# Altium PCB PCB1_Demo.PcbDoc
Units mil, origin at the board's own origin, x right, y up, seen from the top; angles counter-clockwise.
Board outline 4429.1 x 4452.01 mil, 2 copper layers (Top Layer, Bottom Layer); 90 components, 122 nets, 389 pads, 32 vias.
Unrouted connection lines stored in the file: 2.
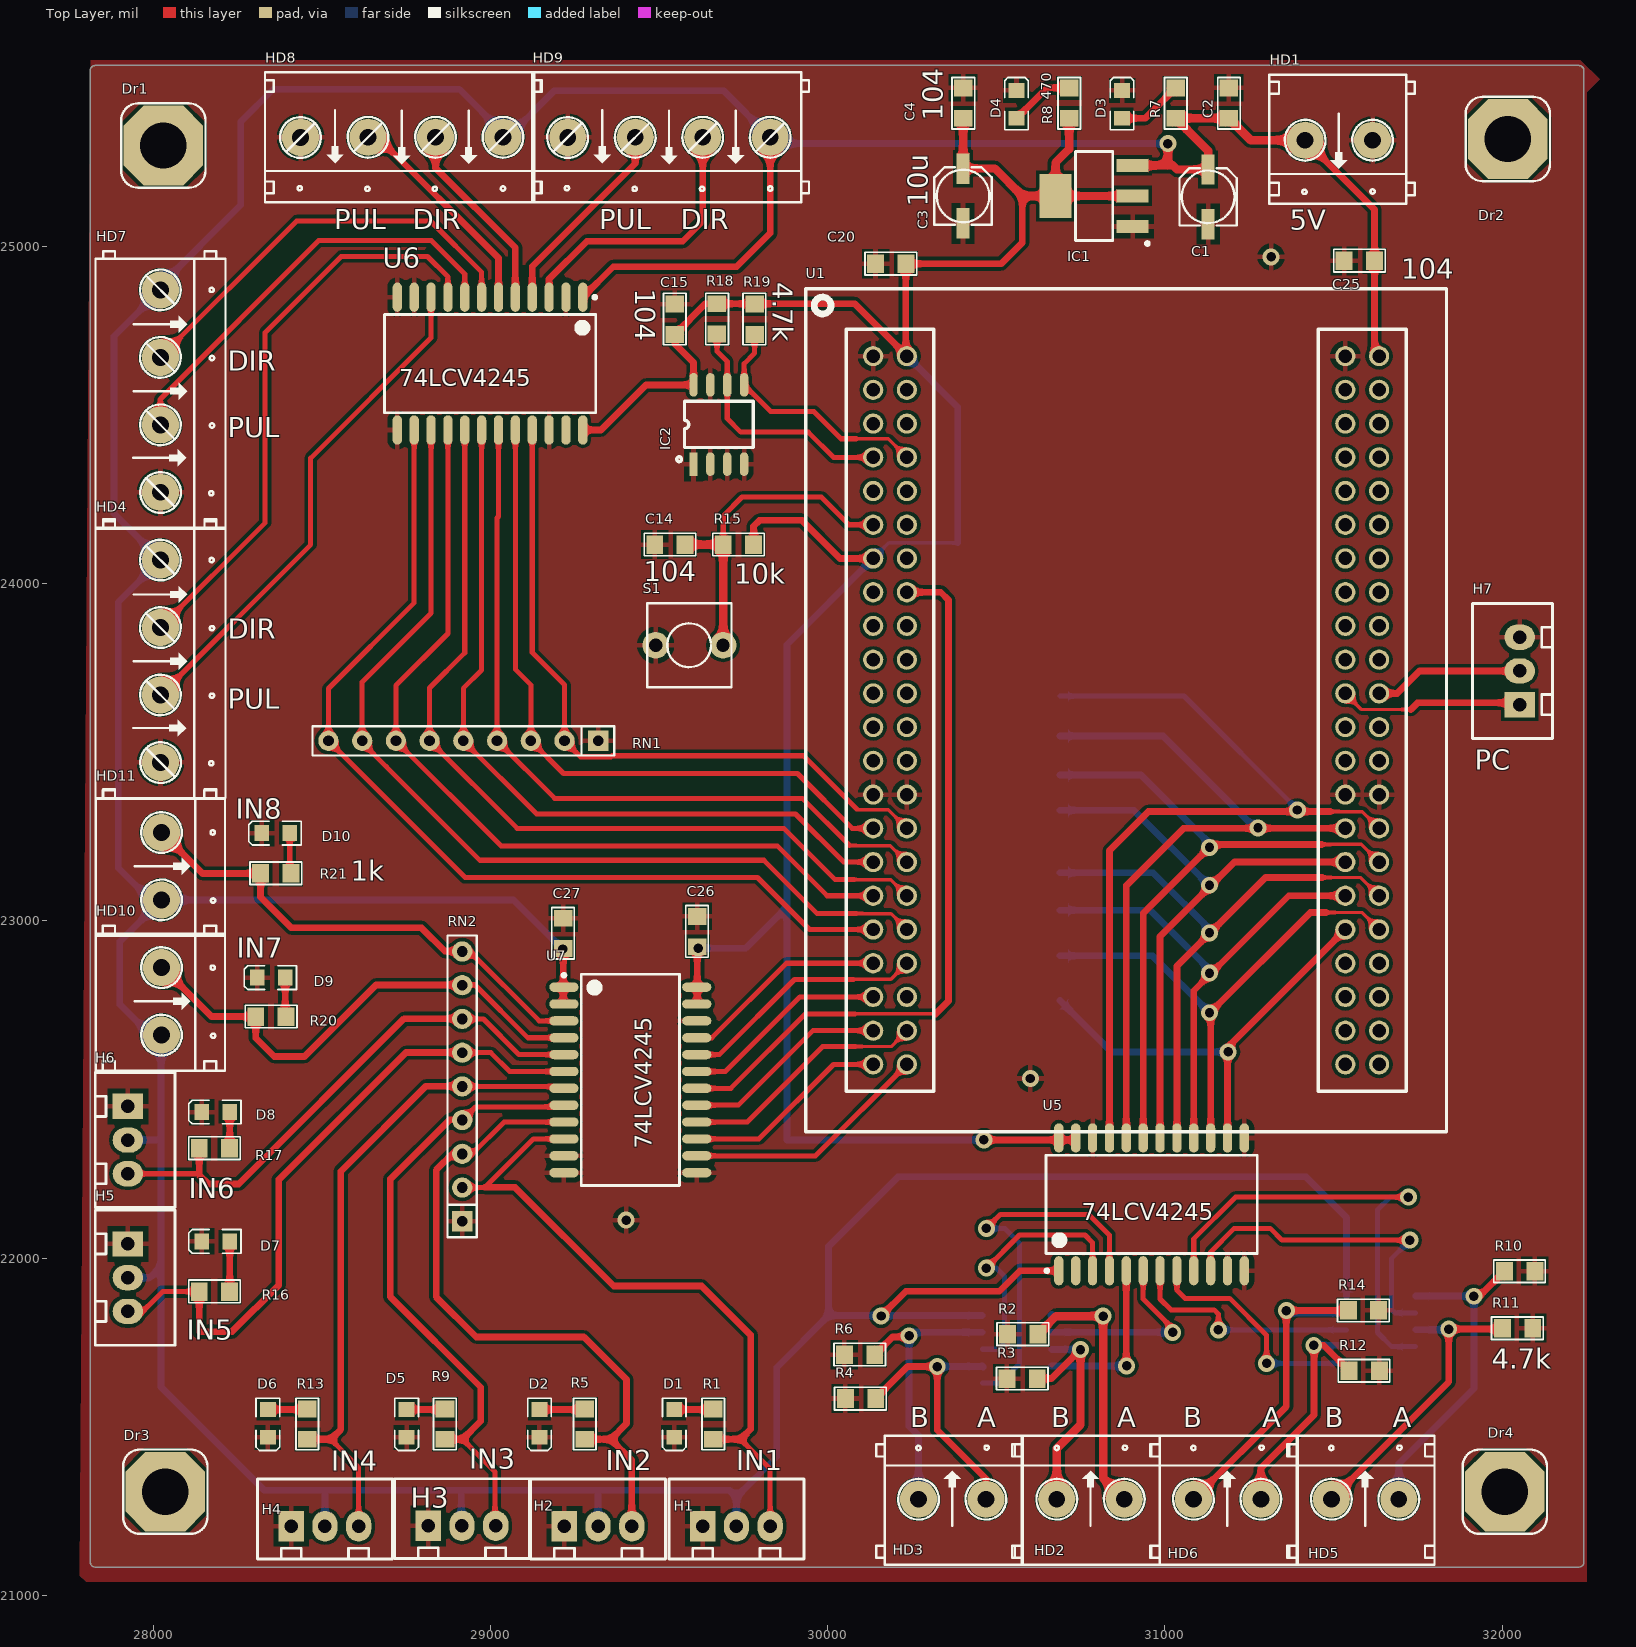
[diagram p0: Top Layer view]
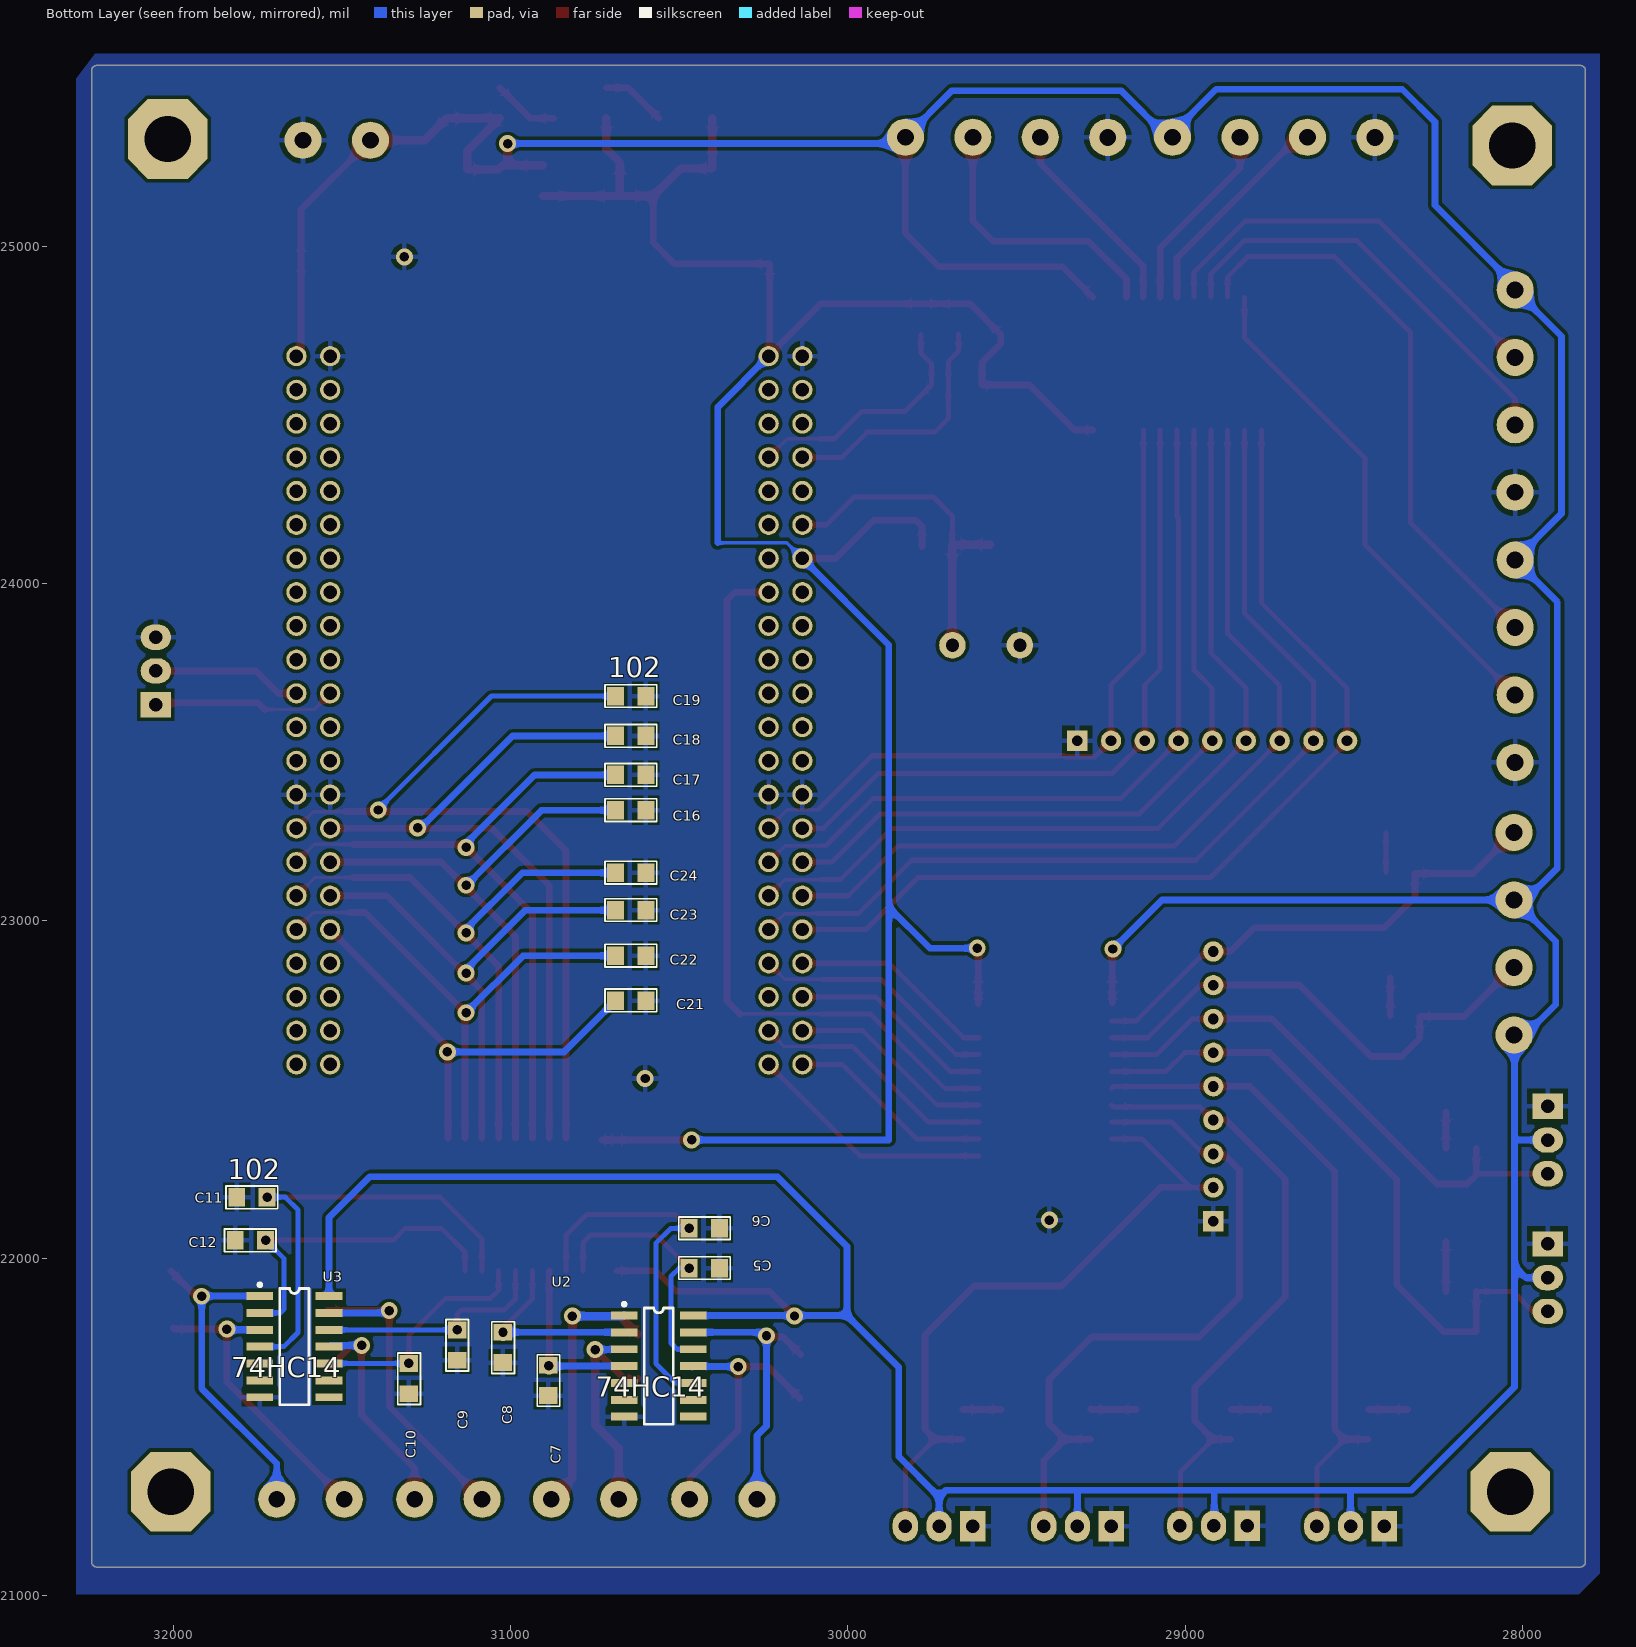
[diagram p1: Bottom Layer view, seen from below]
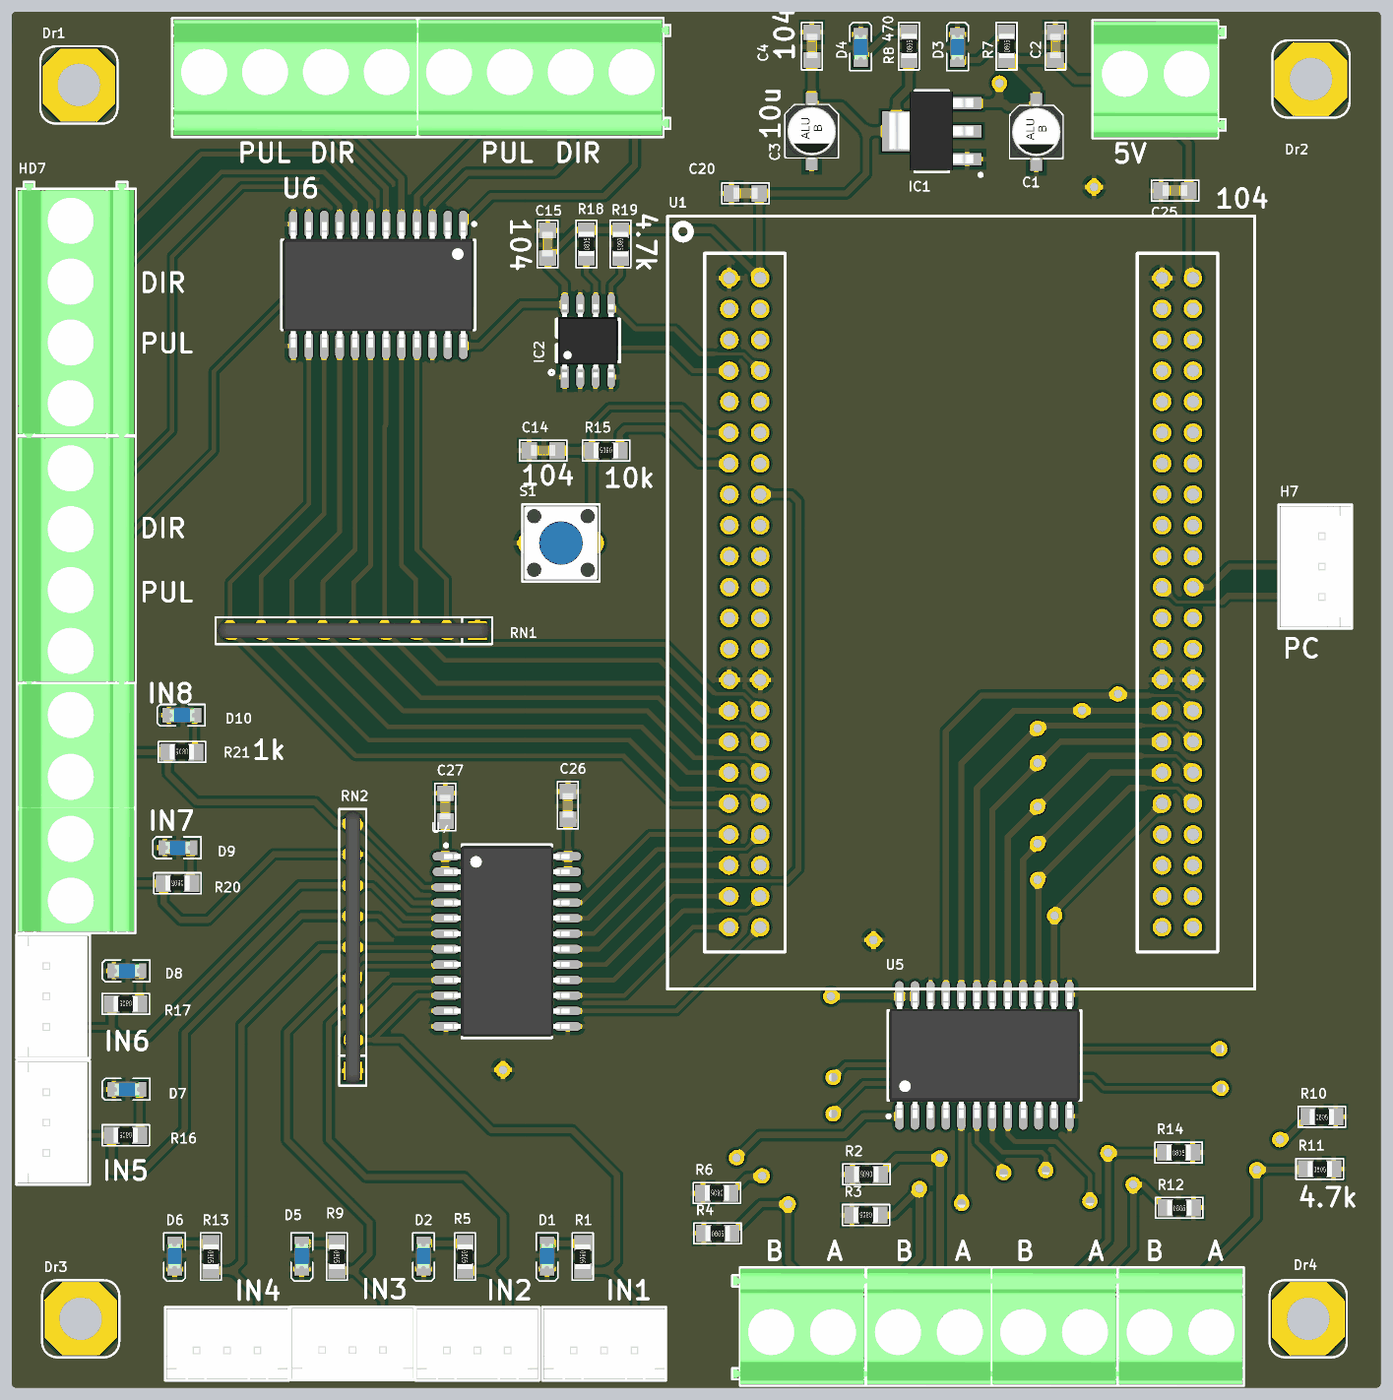
[diagram p2: 3D render of the assembled board from above, using the file's embedded part models]
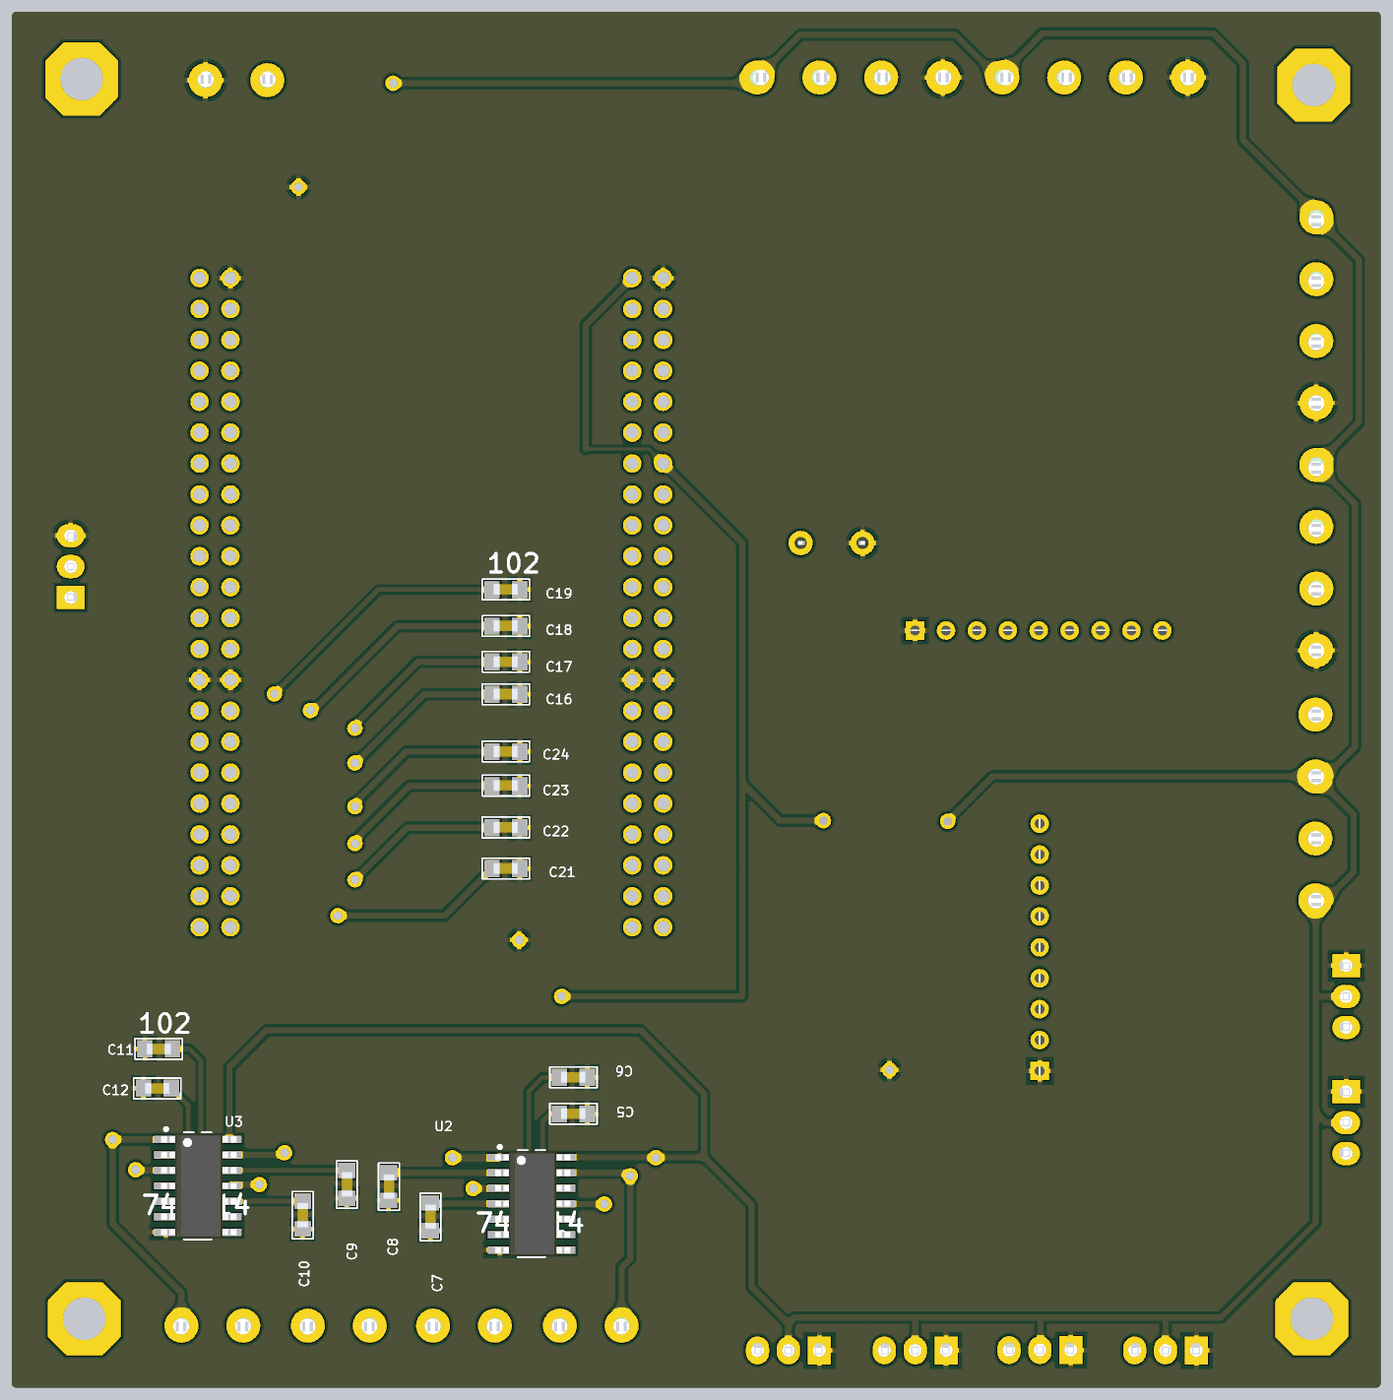
[diagram p3: 3D render of the assembled board from below, using the file's embedded part models]

## Layer stack, top to bottom
Top Solder: solder mask 0.4, Solder Resist, Dk 3.5
Top Layer: signal copper 1.4
Dielectric 1: dielectric 12.6, FR-4, Dk 4.8
Bottom Layer: signal copper 1.4
Bottom Solder: solder mask 0.4, Solder Resist, Dk 3.5

## Board outline
27813.19,21099.42 ccw(c27828.21,21099.42) 27828.21,21084.41 32227.28,21084.41 ccw(c32227.28,21099.42) 32242.29,21099.42 32242.29,25521.4 ccw(c32227.28,25521.4) 32227.28,25536.41 27828.21,25536.41 ccw(c27828.21,25521.4) 27813.19,25521.4

## Design rules (kind name [scope] priority, off if disabled: settings)
Clearance Clearance_1 [All] p1: gap=10
Clearance [All] p2: gap=20
PolygonConnect [All] p1: connectstyle=Relief reliefconductorwidth=15 reliefentries=4 polygonreliefangle="90 Angle" airgapwidth=15
RoutingVias [All] p1: holewidth=28 width=50 viastyle="Through Hole" minholewidth=28 minwidth=50 maxholewidth=28 maxwidth=50
SolderMaskExpansion [All] p1: expansion=4
Width [All] p1: maxlimit=100 minlimit=10 preferedwidth=10
30 further rules are at their usual default settings.

## Components (designator, comment, footprint, x,y, rotation, side; value= is the part's Value field where it differs from the comment)
C1 "10uF/16V" CAP_ALU_B 31127.96,25228.01 r270 top
C2 "104" CAP-SM-0805 31189.22,25380.05 r90 top
C3 "10uF/16V" CAP_ALU_B 30401.23,25230.54 r270 top
C4 "104" CAP-SM-0805 30401.64,25380.05 r90 top
C5 "102" CAP-SM-0805 30380.59,21970.63 r0 bottom
C6 "102" CAP-SM-0805 30380.59,22088.54 r0 bottom
C7 "102" CAP-SM-0805 30888.09,21592.86 r90 bottom
C8 "102" CAP-SM-0805 31022.66,21690.44 r90 bottom
C9 "102" CAP-SM-0805 31158.54,21697.66 r90 bottom
C10 "102" CAP-SM-0805 31301.31,21598.26 r90 bottom
C11 "102" CAP-SM-0805 31811.73,22181.15 r180 bottom
C12 "102" CAP-SM-0805 31816.25,22053.59 r180 bottom
C14 "104" CAP-SM-0805 29577.18,24115.94 r180 top
C15 "104" CAP-SM-0805 29547,24829.12 r270 top
C16 "102" CAP-SM-0805 30598.97,23328.05 r0 bottom
C17 "102" CAP-SM-0805 30598.97,23432.89 r0 bottom
C18 "102" CAP-SM-0805 30598.97,23548.5 r0 bottom
C19 "102" CAP-SM-0805 30598.97,23666.7 r0 bottom
C20 "104" CAP-SM-0805 30231.81,24948.38 r180 top
C21 "102" CAP-SM-0805 30598.97,22764.06 r0 bottom
C22 "102" CAP-SM-0805 30598.97,22896.72 r0 bottom
C23 "102" CAP-SM-0805 30598.97,23032.13 r0 bottom
C24 "102" CAP-SM-0805 30598.97,23142.68 r0 bottom
C25 "104" CAP-SM-0805 31621.29,24957.11 r180 top
C26 "104" CAP-SM-0805 29613.1,23013.73 r270 top
C27 "104" CAP-SM-0805 29216,23008.11 r270 top
D1 "LED" LED_0805_Blue 29545.06,21510.17 r270 top
D2 "LED" LED_0805_Blue 29145.42,21510.17 r270 top
D3 "LED" LED_0805_Blue 30872.83,25421.05 r90 top
D4 "LED" LED_0805_Blue 30559.72,25421.05 r90 top
D5 "LED" LED_0805_Blue 28751.63,21510.17 r270 top
D6 "LED" LED_0805_Blue 28340.25,21510.17 r270 top
D7 "LED" LED_0805_Blue 28185.58,22050.11 r180 top
D8 "LED" LED_0805_Blue 28185.58,22433.52 r180 top
D9 "LED" LED_0805_Blue 28350.29,22831.83 r180 top
D10 "LED" LED_0805_Blue 28363.75,23260.4 r180 top
Dr1 "Drill" "Drill 3mm" 28030.44,25299.19 r0 top
Dr2 "Drill" "Drill 3mm" 32016.5,25318.47 r0 top
Dr3 "Drill" "Drill 3mm" 28036.06,21307.92 r0 top
Dr4 "Drill" "Drill 3mm" 32007.63,21307.92 r0 top
H1 "IN 1" "Header White 3" 29629.54,21205.44 r0 top
H2 "IN 2" "Header White 3" 29219.24,21205.44 r0 top
H3 "IN 3" "Header White 3" 28815.74,21206.61 r0 top
H4 "IN 4" "Header White 3" 28409.51,21205.44 r0 top
H5 "IN 5" "Header White 3" 27925.1,22042.37 r270 top
H6 "IN 6" "Header White 3" 27925.1,22450.51 r270 top
H7 "PC" "Header White 3" 32051.78,23641.24 r90 top
HD1 "5V IN" "Domino 2" 31615.52,25314.85 r180 top
HD2 "ENC 1" "Domino 2" 30679.25,21285.58 r0 top
HD3 "ENC 2" "Domino 2" 30269.11,21285.58 r0 top
HD4 "PWM 1" "Domino 4" 28021.5,24070.07 r270 top
HD5 "ENC 3" "Domino 2" 31493.31,21285.58 r0 top
HD6 "ENC 4" "Domino 2" 31084.31,21285.58 r0 top
HD7 "PWM 2" "Domino 4" 28021.5,24871.01 r270 top
HD8 "PWM 3" "Domino 4" 29037.36,25323.57 r180 top
HD9 "PWM 4" "Domino 4" 29829.52,25323.57 r180 top
HD10 "IN 7" "Domino 2" 28024.67,22861.72 r270 top
HD11 "IN 8" "Domino 2" 28024.67,23262.45 r270 top
IC1 "LM1117-3V3" SOT223-4N 30789.92,25149.51 r180 top
IC2 "24Cxx" SOIC8 29602.22,24354.41 r90 top
R1 "1k" RES-SM-0805 29661.09,21553.17 r270 top
R2 "4.7k" RES-SM-0805 30623.15,21774.42 r180 top
R3 "4.7k" RES-SM-0805 30621.44,21643.19 r180 top
R4 "4.7k" RES-SM-0805 30052.36,21584.14 r0 top
R5 "1k" RES-SM-0805 29280.2,21553.17 r270 top
R6 "4.7k" RES-SM-0805 30139.54,21713.88 r180 top
R7 "470" RES-SM-0805 31031.36,25380.05 r90 top
R8 "470" RES-SM-0805 30715.82,25380.05 r90 top
R9 "10k" RES-SM-0805 28865.31,21553.17 r270 top
R10 "4.7k" RES-SM-0805 32006.89,21961.92 r0 top
R11 "4.7k" RES-SM-0805 32000.28,21793.03 r0 top
R12 "4.7k" RES-SM-0805 31545.78,21666.87 r0 top
R13 "1k" RES-SM-0805 28457.45,21553.17 r270 top
R14 "4.7k" RES-SM-0805 31543.61,21845.87 r0 top
R15 "10k" RES-SM-0805 29780.36,24115.94 r180 top
R16 "1k" RES-SM-0805 28226.58,21901.27 r180 top
R17 "1k" RES-SM-0805 28226.58,22325.88 r180 top
R18 "4.7k" RES-SM-0805 29671.75,24740.12 r90 top
R19 "4.7k" RES-SM-0805 29783.16,24829.12 r270 top
R20 "1k" RES-SM-0805 28394.32,22716.55 r180 top
R21 "1k" RES-SM-0805 28408.5,23141.06 r180 top
RN1 "10K" RN8 29319.74,23534.41 r180 top
RN2 "10K" RN8 28916.55,22109.52 r90 top
S1 "Reset" SW2 29489.93,23817.53 r0 top
U1 "STM_CPLD_Board" STM_CPLD_Board 30134.84,24674.72 r0 top
U2 "74HC14" SO14-150mil 30560.86,21680.25 r270 bottom
U3 "74HC14" SO14-150mil 31640.8,21737.86 r270 bottom
U5 "74LCV4245" "SOIC24 - wide" 30960.38,22159.76 r90 top
U6 "74LCV4245" "SOIC24 - wide" 28998.99,24652.56 r270 top
U7 "74LCV4245" "SOIC24 - wide" 29414.96,22528.76 r0 top

## Footprints (in the part's own frame and the unit in brackets; to place one, negate y for a bottom-side part, rotate by r counter-clockwise, add the part's x,y. Pads: shape width x height; smd on the part's side, far side on the other; paste and mask are expansions set on the pad)
CAP-SM-0805 [mil]
  rect 50x55 smd: 1(0,0) 2(90,0)
  silkscreen extent -32,-34 121,33, body extent 6,-18 84,17, height 47
CAP_ALU_B [mil] "10uF -> 22uF"
  rect 90x38 smd: 1(0,0) 2(162,0)
  silkscreen extent -4,-85 166,85, body extent -10,-85 172,85, height 213
"Domino 2" [mil] "Domino 2, 2 pin, hight 300mil, Pin to Pin 200, Colour Green"
  round 110 hole 50: 1(0,0) 2(200,0)
  silkscreen extent -125,-194 306,189, body extent -121,-190 301,184, height 591
"Domino 4" [mil] "Domino 4, 4 pin, height 300mil, Pin to Pin 200, Colour Green"
  round 110 hole 50: 1(0,0) 2(200,0) 3(400,0.06) 4(600,0.39)
  silkscreen extent -115,-193 706,193, body extent -110,-187 700,187, height 591
"Drill 3mm" [mm]
  oct 6x6 hole 3.5: 1(0,0)
  silkscreen extent -3.17,-3.17 3.17,3.17
"Header White 3" [mil] "JST Connector"
  rect 75x90 hole 40: 1(0,0)
  oval 75x90 hole 40: 2(100,0) 3(200,0)
  silkscreen extent -100,-97 300,140, body extent -95,-93 295,134, height 276
LED_0805_Blue [mm] "Chip LED, 2-Leads, Body 2.0x1.3mm, IPC Medium Density"
  rect 1.1x1.2 smd: 1(-1.05,0) 2(1.05,0)
  silkscreen extent -1.91,-0.89 2.03,0.89, body extent -1.01,-0.62 1.01,0.63, height 1.1
RES-SM-0805 [mil]
  rect 50x55 smd: 1(0,0) 2(90,0)
  silkscreen extent -32,-34 121,33, body extent 6,-25 84,24, height 10
RN8 [mil] "R SIP8, 9 Pin"
  rect 60x60 hole 32: 1(0,0)
  round 60 hole 32: 2(100,0) 3(200,0) 4(300,0) 5(400,0) 6(500,0) 7(600,0) 8(700,0) 9(800,0)
  silkscreen extent -48,-43 847,44, body extent -43,-25 843,24, height 219
SO14-150mil [mm] "Small Outline; 14 Leads; Body Width 3.9 mm; Pitch 1.27 mm"
  rect 0.6x2 smd: 1(-3.81,-2.6) 2(-2.54,-2.6) 3(-1.27,-2.6) 4(0,-2.6) 5(1.27,-2.6) 6(2.54,-2.6) 7(3.81,-2.6) 8(3.81,2.6) 9(2.54,2.6) 10(1.27,2.6) 11(0,2.6) 12(-1.27,2.6) 13(-2.54,2.6) 14(-3.81,2.6)
  silkscreen extent -4.78,-2.72 4.38,1.1, body extent -4.32,-3 4.32,3.2, height 1.7
SOIC8 [mil]
  rect 70x25 smd: 1(0,0)
  oval 70x25 smd: 2(0,-50) 3(0,-100) 4(0,-150) 5(235,-150) 6(235,-100) 7(235,-50) 8(235,0)
  silkscreen extent 8,-178 187,50, body extent -1,-171 235,21, height 69
"SOIC24 - wide" [mm] "SOIC, 24-Leads, Body 15.4x7.5mm, Pitch 1.27mm, IPC Low Density"
  oval 2.2x0.7 smd: 1(-5,6.985) 2(-5,5.715) 3(-5,4.445) 4(-5,3.175) 5(-5,1.905) 6(-5,0.635) 7(-5,-0.635) 8(-5,-1.905) 9(-5,-3.175) 10(-5,-4.445) 11(-5,-5.715) 12(-5,-6.985) 13(5,-6.985) 14(5,-5.715) 15(5,-4.445) 16(5,-3.175) 17(5,-1.905) 18(5,-0.635) 19(5,0.635) 20(5,1.905) 21(5,3.175) 22(5,4.445) 23(5,5.715) 24(5,6.985)
  silkscreen extent -5.12,-7.95 3.7,8.01, body extent -5.15,-7.8 5.15,7.8, height 2.65
SOT223-4N [mm] "SOT223, 4-Leads, Body 6.5x3.5mm, Pitch 2.3mm, Lead Span 7mm, IPC Medium Density"
  rect 2.4x1 smd: 1(-2.9,2.3) 2(-2.9,0) 3(-2.9,-2.3)
  rect 2.4x3.3 smd: 4(2.9,0)
  silkscreen extent -4.14,-3.35 1.4,3.71, body extent -3.39,-3.27 3.5,3.23, height 1.72
STM_CPLD_Board [mil] "Stm32f4 and Max2 520 on one board"
  round 60 hole 40: 1(0,0) 2(0,-100) 3(0,-200) 4(0,-300) 5(0,-400) 6(0,-500) 7(0,-600) 8(0,-700) 9(0,-800) 10(0,-900) 11(0,-1000) 12(0,-1100) 13(0,-1200) 14(0,-1300) 15(0,-1400) 16(0,-1500) 17(0,-1600) 18(0,-1700) 19(0,-1800) 20(0,-1900) 21(0,-2000) 22(0,-2100) 23(100,-2100) 24(100,-2000) 25(100,-1900) 26(100,-1800) 27(100,-1700) 28(100,-1600) 29(100,-1500) 30(100,-1400) 31(100,-1300) 32(100,-1200) 33(100,-1100) 34(100,-1000) 35(100,-900) 36(100,-800) 37(100,-700) 38(100,-600) 39(100,-500) 40(100,-400) 41(100,-300) 42(100,-200) 43(100,-100) 44(100,0) 45(1400,0) 46(1400,-100) 47(1400,-200) 48(1400,-300) 49(1400,-400) 50(1400,-500) 51(1400,-600) 52(1400,-700) 53(1400,-800) 54(1400,-900) 55(1400,-1000) 56(1400,-1100) 57(1400,-1200) 58(1400,-1300) 59(1400,-1400) 60(1400,-1500) 61(1400,-1600) 62(1400,-1700) 63(1400,-1800) 64(1400,-1900) 65(1400,-2000) 66(1400,-2100) 67(1500,-2100) 68(1500,-2000) 69(1500,-1900) 70(1500,-1800) 71(1500,-1700) 72(1500,-1600) 73(1500,-1500) 74(1500,-1400) 75(1500,-1300) 76(1500,-1200) 77(1500,-1100) 78(1500,-1000) 79(1500,-900) 80(1500,-800) 81(1500,-700) 82(1500,-600) 83(1500,-500) 84(1500,-400) 85(1500,-300) 86(1500,-200) 87(1500,-100) 88(1500,0)
  silkscreen extent -200,-2300 1700,200
SW2 [mm] "SW button 2pin, 250x 250 mil"
  round 2 hole 1: 1(0,0) 2(5.08,0)
  silkscreen extent -0.64,-3.17 5.71,3.17, body extent -0.51,-3.05 5.59,3.05, height 4.2

## Part data
C1 C3: library part CP2, "C 47uF/50V , 220uF/16V"
C2 C4 C5 C6 C7 C8 C9 C10 C11 C12 C14 C15 C16 C17 C18 C19 C20 C21 C22 C23 C24 C25 C26 C27: library part CAP_SM_0805, "Ceramic Capacitor SMD"
D1 D2 D3 D4 D5 D6 D7 D8 D9 D10: library part LED_SMD, "LED SMD"
Dr1 Dr2 Dr3 Dr4: library part "Drill 3mm", "Drill 3mm"
H1 H2 H3 H4 H5 H6 H7: library part "Header white 3", "Connector 3"
HD1 HD2 HD3 HD5 HD6 HD10 HD11: library part "Domino 2", "Domino 2 200mil"
HD4 HD7 HD8 HD9: library part "Domino 4", "Domino 4 200mil"
IC1: library part LM1117, "Available in 1.8V, 2.5V, 2.85V, 3.3V, 5V, and  Adjustable Versions"
IC2: "Standard 2-Wire Bus Interface Serial EEPROM"
R1 R2 R3 R4 R5 R6 R7 R8 R9 R10 R11 R12 R13 R14 R15 R16 R17 R18 R19 R20 R21: library part Res-SMD, "Resistor"
RN1 RN2: library part RN8, "Resistor 8 (Thanh)"
S1: library part "SW - 2Pin", "Switch button 2 pin"
U1: "STM32f4 and Max2 570 on one board"
U2 U3: "Hex Inverters With SCHMITT-TRIGGER Inputs"
U5 U6 U7: "Octal dual supply translating transceiver; 3-state"

## Via types
v1: diameter 50, hole 28, Top Layer to Bottom Layer, 32 vias

## Nets (pads, with @x,y where several pads share a name; then routed paths per layer and width w, separated by ;. In a path a pad name is that pad's centre, name@x,y a point inside that pad or via, vN(x,y) a via of type N, cw(c..) or ccw(c..) an arc to the next point about the centre after c; other vN are vias at no path point)
3V3: C3.1 C4.1 C15.2 C20.1 C26.2 IC1.2 IC1.4 IC2.8 R8.1 R15.1 R18.2 R19.1 U1.7 U1.44 U5.23 U5.24 U6.23 U6.24 U7.23 U7.24 | length 7570.2
  Top Layer w20: U6.24 29327.77,24455.71 29461.47,24589.41 IC2.8 29602.22,24655.47 29547,24710.69 C15.2 29638,24830.12 R18.2 30079.44,24830.12 30231.81,24677.75 C20.1 30513.6,24948.38 30577,25011.78 30577,25149.51 ; U7.23@29613.1,22755.05 C26.2 ; R15.1@29780.36,24110.5 29780.36,24170.21 29797.92,24187.77 29923.7,24187.77 30036.76,24074.72 U1.7 ; v1(30463.21,22350.7) U5.23@30729.47,22350.7
  Top Layer w25: C4.1 30401.64,25230.95 30495.56,25230.95 30577,25149.51 IC1.4 ; R8.1 30715.82,25288.28 30675.75,25248.21 IC1.4 ; IC1.2 IC1.4
  Bottom Layer w10: U1.7 30181.64,24121.52 30385.49,24121.52
  Bottom Layer w20: v1(29616.38,22919.35) 29757.24,22919.35 29879.07,23041.18 ; U1.7 29879.07,23818.94 29879.07,23041.18 ; U1.44 30385.49,24524.07 30385.49,24121.52 ; v1(30463.21,22350.7) 29879.07,22350.7 29879.07,23041.18
5V: C1.1 C2.1 C25.1 C27.2 H1.2 H2.2 H3.2 H4.2 H5.2 H6.2 HD1.2 HD4.1 HD7.1 HD8.1 HD9.1 HD10.2 HD11.2 IC1.3 R7.1 U1.88 U2.14 U3.14 U5.1 U5.2 U6.1 U7.1 U7.2 | length 17349.8
  Top Layer w20: U7.2@29216,22755.87 C27.2 ; U6.1 29364.14,24939.56 29730.1,24939.56 29829.52,25038.98 HD9.1 ; v1(30158.25,21828.73) 30231.74,21902.22 30508.91,21902.22 30569.61,21962.91 U5.1 ; HD1.2 31621.29,25109.08 C25.1 31621.29,24688.27 U1.88
  Top Layer w25: IC1.3 31008.74,25240.06 ; v1(31008.74,25304.88) 31008.74,25240.06 ; HD1.2 31254.43,25314.85 C2.1 R7.1 31127.96,25283.45 C1.1 31035.73,25228.01 31023.68,25240.06 31008.74,25240.06
  Bottom Layer w20: H5.2 27990.24,21942.37 28023.5,21975.63 ; H6.2 28013.07,22350.51 28023.5,22360.93 ; HD10.2@27991.88,22661.72 27901.23,22752.37 27901.23,22939 HD11.2 ; HD10.2@28023.5,22660.46 28023.5,22360.93 ; HD11.2@28023.5,23066.71 HD11.2@28019.24,23062.45 ; H4.2 28509.51,21310.49 ; H3.2@28913.48,21205.44 28913.48,21311.67 ; v1(29214.34,22916.92) 29068.81,23062.45 HD11.2 ; H2.2 29319.24,21310.63 ; H1.2 29729.54,21292.08 ; HD9.1 29691.29,25461.8 29190.17,25461.8 29051.94,25323.57 HD8.1 29037.36,25336.65 28907.95,25466.05 28356.28,25466.05 28259.58,25369.35 28259.58,25121.91 28021.5,24883.84 HD7.1 27884.03,24733.54 27884.03,24207.54 HD4.1 27896.53,23945.09 27896.53,23157.36 27991.44,23062.45 HD11.2@28019.24,23062.45 ; HD9.1@29848.21,25304.88 v1(31008.74,25304.88) ; U2.14 30002.5,21830.25 ; U3.14 31538.43,22120.64 31417.8,22241.27 30208.53,22241.27 30002.5,22035.25 30002.5,21830.25 ; HD11.2@28019.24,23062.45 HD11.2 ; 28023.5,21975.63 28023.5,21618.35 28329.83,21312.02 29709.61,21312.02 29729.54,21292.08 ; 28023.5,21975.63 28023.5,22360.93 ; 29729.54,21292.08 29848.9,21411.44 29848.9,21676.65 30002.5,21830.25
DIR_0: RN1.8 U1.27 U6.15 | length 2856.1
  Top Layer w10: 30084.92,23021.77 30187.78,23021.77 U1.27
  Top Layer w15: U6.15 28823.99,23912.63 28619.74,23708.38 RN1.8 28619.74,23528.85 28691.31,23457.28 28968.61,23179.98 29810.75,23179.98 29968.95,23021.77 30084.92,23021.77
DIR_1: RN1.6 U1.28 U6.17 | length 2570
  Top Layer w10: 30078.48,23122.33 30187.23,23122.33 U1.28
  Top Layer w15: U6.17 28923.99,23795.13 28819.74,23690.88 RN1.6 29079.58,23274.57 29870.12,23274.57 30022.36,23122.33 30078.48,23122.33
DIR_2: RN1.4 U1.29 U6.19 | length 2287.2
  Top Layer w10: 30065.08,23223.55 30186.01,23223.55 U1.29
  Top Layer w15: U6.19 29023.99,24198.96 29019.74,24194.71 RN1.4 29190.47,23363.68 29924.95,23363.68 30065.08,23223.55
DIR_3: RN1.2 U1.30 U6.21 | length 2086.1
  Top Layer w10: 30085.44,23332.78 30088.5,23329.72 30179.84,23329.72 U1.30
  Top Layer w15: U6.21 29123.99,23795.82 29219.74,23700.07 RN1.2 29267.24,23486.91 29356.99,23486.91 29359.97,23489.89 29928.32,23489.89 30085.44,23332.78
EEP_SCL: IC2.6 R18.1 U1.4 | length 743.3
  Top Layer w15: R18.1 29671.75,24689.01 29702.22,24658.54 IC2.6 29702.22,24489.71 29742.62,24449.32 29942.74,24449.32 30017.34,24374.72 U1.4
EEP_SDA: IC2.5 R19.2 U1.41 | length 734.1
  Top Layer w10: 30083.91,24429.67 30179.89,24429.67 U1.41
  Top Layer w15: R19.2 29783.16,24683.43 29752.22,24652.49 IC2.5 29831.19,24510.44 29958.75,24510.44 30039.52,24429.67 30083.91,24429.67
ENC_A0: C16.2 U1.60 U5.18 | length 1787.9
  Top Layer w20: U5.18 30985.38,22954.18 31205.92,23174.72 U1.60
  Bottom Layer w20: C16.2 30907.99,23328.05 31130.18,23105.85 v1@31146.5,23105.85
  other v1: 31131.97,23105.85
ENC_A1: C18.2 U1.59 U5.20 | length 2168.1
  Top Layer w20: U5.20 30885.38,23105.31 31054.79,23274.72 U1.59
  Bottom Layer w20: C18.2 30994.52,23548.5 31267.21,23275.82 v1(31275.81,23275.82)
ENC_A2: C21.2 U1.62 U5.14 | length 1324.1
  Top Layer w20: U5.14 31185.38,22625.25 U1.62
  Bottom Layer w20: C21.2 30841.18,22611.85 v1(31187.19,22611.85)
ENC_A3: C23.2 U1.61 U5.16 | length 1533.7
  Top Layer w20: U5.16 31085.38,22793.12 31366.97,23074.72 U1.61
  Bottom Layer w20: C23.2 30955.78,23032.13 v1@31142.63,22845.29
  other v1: 31131.97,22845.29
ENC_B0: C17.2 U1.73 U5.19 | length 2015.3
  Top Layer w10: 31464.49,23226.98 31582.58,23226.98 U1.73
  Top Layer w20: U5.19 30935.38,23022.54 31139.82,23226.98 31464.49,23226.98
  Bottom Layer w20: C17.2 30928.92,23432.89 v1@31143.6,23218.21
  other v1: 31131.97,23218.21
ENC_B1: C19.2 U1.74 U5.21 | length 2572.4
  Top Layer w10: 31489.96,23324.2 31585.35,23324.2 U1.74
  Top Layer w20: U5.21 30835.38,23208.85 30950.74,23324.2 31489.96,23324.2
  Bottom Layer w15: C19.2 31056.53,23666.7 v1@31399.36,23323.87
  other v1: 31392.49,23329.01
ENC_B2: C22.2 U1.71 U5.15 | length 1528.4
  Top Layer w10: 31477.7,23025.01 31584.55,23025.01 U1.71
  Top Layer w20: U5.15 31135.38,22729.43 31430.95,23025.01 31477.7,23025.01
  Bottom Layer w20: C22.2 30963.34,22896.72 v1(31131.97,22728.08)
ENC_B3: C24.2 U1.72 U5.17 | length 1768.7
  Top Layer w10: 31466.38,23128.83 31580.73,23128.83 U1.72
  Top Layer w20: U5.17 31035.38,22866.19 31298.02,23128.83 31466.38,23128.83
  Bottom Layer w20: C24.2 30965.35,23142.68 v1@31143.6,22964.43
  other v1: 31131.97,22964.43
GND: C1.2 C2.2 C3.2 C4.2 C5.1 C6.1 C7.1 C8.1 C9.1 C10.1 C11.1 C12.1 C14.2 C15.1 C16.1 C17.1 C18.1 C19.1 C20.2 C21.1 C22.1 C23.1 C24.1 C25.2 C26.1 C27.1 D1.2 D2.2 D3.2 D4.2 D5.2 D6.2 D7.2 D8.2 D9.2 D10.2 H1.1 H2.1 H3.1 H4.1 H5.1 H6.1 H7.3 HD1.1 HD4.4 HD7.4 HD8.4 HD9.4 IC1.1 IC2.1 IC2.2 IC2.3 IC2.4 IC2.7 R2.2 R3.2 R4.1 R6.2 R10.2 R11.2 R12.2 R14.2 RN1.1 RN2.1 S1.1 U1.1 U1.14 U1.31 U1.45 U1.58 U1.75 U2.7 U3.7 U5.11 U5.12 U5.13 U5.22 U6.2 U6.11 U6.12 U6.13 U6.22 U7.11 U7.12 U7.13 U7.22
  other v1: 29402.54,22113.17 30601.04,22532.94 31314.75,24969.13
H_DIR_0: HD4.2 U6.9 | length 1723.8
  Top Layer w15: HD4.2 28332.16,24180.73 28332.16,24744.55 28557.86,24970.25 28813.43,24970.25 28873.99,24909.68 U6.9
H_DIR_1: HD7.2 U6.7 | length 1257.1
  Top Layer w15: HD7.2 28425.9,25075.41 28822.16,25075.41 28973.99,24923.58 U6.7
H_DIR_2: HD8.2 U6.5 | length 572.2
  Top Layer w20: HD8.2 28837.36,25232.6 29073.99,24995.97 U6.5
H_DIR_3: HD9.2 U6.3 | length 829.3
  Top Layer w20: U6.3 29173.99,24903.15 29286.13,25015.29 29570.28,25015.29 29629.52,25074.53 HD9.2
H_ENC_A0: HD2.2 R2.1 U2.1 | length 939.3
  Top Layer w25: R2.1 30677.28,21828.55 v1(30816.53,21828.55) 30816.53,21348.29 HD2.2
  Bottom Layer w25: U2.1@30663.86,21830.89 30665.49,21829.26 30666.57,21830.34 30668.37,21828.55 v1(30816.53,21828.55)
H_ENC_A1: HD3.2 R4.2 U2.11 | length 808.3
  Top Layer w20: R4.2 30237.09,21678.88 v1(30324.85,21678.88) 30324.85,21490.55 30469.11,21346.3 HD3.2
  Bottom Layer w20: v1(30324.85,21678.88) U2.11@30455.22,21678.88 ; U2.11@30457.55,21681.2 U2.11 ; U2.11@30459.87,21678.88 U2.11@30461.15,21677.6
H_ENC_A2: HD5.2 R10.1 U3.1 | length 988.4
  Top Layer w20: v1(31915.96,21887.54) 31932.51,21887.54 R10.1
  Bottom Layer w20: HD5.2 31693.31,21391.7 31915.96,21614.35 v1(31915.96,21887.54) ; U3.1 v1@31915.65,21887.86
H_ENC_A3: HD6.2 R12.1 U3.11 | length 746.2
  Top Layer w20: HD6.2 31284.31,21377.67 31442.18,21535.54 v1@31442.18,21737.48 ; v1(31441.2,21741.83) 31470.82,21741.83 R12.1
  Bottom Layer w20: v1(31441.2,21741.83) U3.11@31534.46,21741.83
H_ENC_B0: HD2.1 R3.1 U2.3 | length 721.7
  Top Layer w20: R3.1 30663.6,21643.19 v1(30749.57,21729.15)
  Top Layer w25: HD2.1 30679.25,21436.05 30749.57,21506.37 v1(30749.57,21729.15)
  Bottom Layer w20: U2.3@30664.32,21729.15 v1(30749.57,21729.15)
H_ENC_B1: HD3.1 R6.1 U2.13 | length 842.4
  Top Layer w20: R6.1 30192.47,21766.81 30238.07,21766.81 v1(30241.29,21770.03)
  Bottom Layer w20: HD3.1 30269.11,21474.3 30241.29,21502.11 v1(30241.29,21770.03) 30251.51,21780.25 U2.13
H_ENC_B2: HD5.1 R11.1 U3.3 | length 904.8
  Top Layer w20: HD5.1 31841.26,21633.53 v1(31841.26,21790.06) 31997.31,21790.06 R11.1
  Bottom Layer w20: U3.3 v1@31839.06,21787.86
H_ENC_B3: HD6.1 R14.1 U3.13 | length 1037.8
  Top Layer w20: HD6.1 31359.79,21561.06 v1(31359.79,21844.87) R14.1@31542.61,21844.87
  Bottom Layer w20: v1(31359.79,21844.87) 31366.8,21837.86 U3.13
H_PWM_0: HD4.3 U6.10 | length 1511.7
  Top Layer w15: HD4.3 28467.08,24115.59 28467.08,24372.14 28823.99,24729.05 U6.10
H_PWM_1: HD7.3 U6.8 | length 1283.6
  Top Layer w15: HD7.3 28021.56,24547.86 28490.96,25017.25 28824.99,25017.25 28923.99,24918.26 U6.8
H_PWM_2: HD8.3 U6.6 | length 651
  Top Layer w20: HD8.3 28666.02,25323.51 29023.99,24965.54 U6.6
H_PWM_3: HD9.3 U6.4 | length 600.6
  Top Layer w20: U6.4 29123.99,24940.38 29429.52,25245.91 HD9.3
IN_0: U1.23 U7.14 | length 735.3
  Top Layer w15: U7.14 29963.89,22303.76 U1.23
IN_1: U1.22 U7.15 | length 614.6
  Top Layer w15: U7.15 29795.98,22353.76 30016.94,22574.72 U1.22
IN_2: U1.24 U7.16 | length 735.8
  Top Layer w10: 30083.06,22627.72 30188.77,22627.72 30234.84,22673.79 U1.24
  Top Layer w15: U7.16 29761.45,22403.76 29985.42,22627.72 30083.06,22627.72
IN_3: U1.21 U7.17 | length 614.6
  Top Layer w15: U7.17 29734.85,22453.76 29955.8,22674.72 U1.21
IN_4: U1.37 U7.18 | length 2175.6
  Top Layer w10: 30080.48,22724.41 30320.15,22724.41
  Top Layer w15: U7.18 29712.64,22503.76 29933.3,22724.41 30080.48,22724.41
  Top Layer w20: U1.37 30335.1,23974.72 30358.19,23951.63 30358.19,22762.44 30320.15,22724.41
IN_5: U1.20 U7.19 | length 614.6
  Top Layer w15: U7.19 29696.61,22553.76 29917.56,22774.72 U1.20
IN_6: U1.26 U7.20 | length 735.3
  Top Layer w10: 30076.61,22826.26 30077.9,22827.54 30187.67,22827.54 U1.26
  Top Layer w15: U7.20 29678.8,22603.76 29901.3,22826.26 30076.61,22826.26
IN_7: U1.19 U7.21 | length 614.6
  Top Layer w15: U7.21 29656.61,22653.76 29877.57,22874.72 U1.19
IN_EN_A0: C8.2 U2.2 U5.6 | length 578
  Top Layer w15: U5.6 30935.38,21879.22 31022.47,21792.13 v1(31022.47,21780.25)
  Bottom Layer w20: U2.2 v1(31022.47,21780.25)
IN_EN_A1: C6.2 U2.10 U5.4 | length 1120.9
  Top Layer w15: v1(30470.59,22088.54) 30511.73,22129.69 30774.2,22129.69 30835.38,22068.51 U5.4
  Bottom Layer w15: U2.10 30511.51,21630.25 30569.22,21687.96 30569.22,22044.63 30525.31,22088.54 v1(30470.59,22088.54)
IN_EN_A2: C12.2 U3.2 U5.10 | length 994
  Top Layer w15: U5.10 31135.38,22018.8 31205.26,22088.68 31311.96,22088.68 31347.05,22053.59 v1(31726.25,22053.59)
  Bottom Layer w15: v1(31726.25,22053.59) 31671.28,21998.62 31671.28,21849.15 31682.58,21837.86 U3.2
IN_EN_A3: C10.2 U3.10 U5.8 | length 699.2
  Top Layer w15: U5.8 31035.38,21905.22 31059.43,21881.17 31191.97,21881.17 31301.31,21771.83 v1(31301.31,21688.26)
  Bottom Layer w15: v1(31301.31,21688.26) U3.10@31538.03,21688.26
IN_EN_B0: C7.2 U2.4 U5.5 | length 504.4
  Top Layer w20: v1@30885.38,21681.91 U5.5
  Bottom Layer w20: U2.4 30885.48,21680.25 v1(30886.26,21681.03)
IN_EN_B1: C5.2 U2.12 U5.3 | length 783.1
  Top Layer w15: v1(30470.59,21970.63) 30568.78,22068.81 30762.78,22068.81 30785.38,22046.21 U5.3
  Bottom Layer w15: U2.12 30505.61,21730.25 30524.39,21749.03 30524.39,21946.53 30500.29,21970.63 v1(30470.59,21970.63)
IN_EN_B2: C11.2 U3.4 U5.9 | length 1383.1
  Top Layer w15: U5.9 31085.38,22057.73 31208.8,22181.15 v1(31721.73,22181.15)
  Bottom Layer w15: v1(31721.73,22181.15) 31668.1,22181.15 31630.38,22143.44 31630.38,21779.71 31672.24,21737.86 U3.4
IN_EN_B3: C9.2 U3.12 U5.7 | length 701.7
  Top Layer w15: U5.7 30985.38,21879.47 31017.79,21847.06 31145.79,21847.06 31158.54,21834.31 v1(31158.54,21787.66)
  Bottom Layer w15: v1(31158.54,21787.66) U3.12@31538.24,21787.66
NetD1_1: D1.1 R1.1 | length 114.4
  Top Layer w20: D1.1 R1.1@29659.43,21551.51
NetD2_1: D2.1 R5.1 | length 135.5
  Top Layer w20: D2.1 29278.54,21551.51 R5.1
NetD3_1: D3.1 R7.2 | length 195.9
  Top Layer w20: D3.1 30941.02,25379.72 R7.2
NetD4_1: D4.1 R8.2 | length 193.5
  Top Layer w20: D4.1 30650.06,25470.05 R8.2
NetD5_1: D5.1 R9.1 | length 112
  Top Layer w20: D5.1 R9.1@28863.65,21551.51
NetD6_1: D6.1 R13.1 | length 115.5
  Top Layer w20: D6.1 R13.1@28455.79,21551.51
NetD7_1: D7.1 R16.1 | length 148.5
  Top Layer w20: R16.1@28226.92,21901.61 D7.1
NetD8_1: D8.1 R17.1 | length 107.3
  Top Layer w20: R17.1@28226.92,22326.22 D8.1
NetD9_1: D9.1 R20.1 | length 112.6
  Top Layer w20: R20.1@28391.63,22719.24 D9.1
NetD10_1: D10.1 R21.1 | length 115.9
  Top Layer w15: R21.1@28405.08,23144.48 D10.1
NRST: C14.1 R15.2 S1.2 U1.6 | length 992.3
  Top Layer w15: R15.2 29690.36,24200.91 29746.19,24256.74 29981.08,24256.74 30063.1,24174.72 U1.6
  Top Layer w25: C14.1 R15.2 ; S1.2@29690.36,23817.95 R15.2@29690.36,24110.5
O_IN_0: H1.3 R1.2 RN2.2 U7.10 | length 2026.8
  Top Layer w15: RN2.2 28983.08,22209.52 28983.87,22210.31 29127.32,22353.76 U7.10 ; 29741.78,21463.17 29829.54,21375.41 H1.3
  Top Layer w20: 28983.87,22210.31 29073.21,22210.31 29365.79,21917.73 29626.26,21917.73 29771.65,21772.35 29771.65,21493.04 29741.78,21463.17 R1.2
O_IN_1: H2.3 R5.2 RN2.3 U7.9 | length 2036.5
  Top Layer w15: RN2.3 28946.47,22309.52 29040.7,22403.76 U7.9
  Top Layer w20: RN2.3@28916.55,22310.31 28888.27,22310.31 28839.22,22261.26 28839.22,21885.6 28958.09,21766.73 29277.12,21766.73 29403.59,21640.27 29403.59,21510.03 29356.73,21463.17 ; R5.2 29356.73,21463.17 ; H2.3 29419.24,21400.66 29356.73,21463.17
O_IN_2: H3.3 R9.2 RN2.4 U7.8 | length 1860.4
  Top Layer w15: RN2.4 28955.53,22448.51 29212.86,22448.51 U7.8 ; 28916.94,21463.17 29013.48,21366.63 H3.3@29013.48,21205.44
  Top Layer w20: R9.2 28916.94,21463.17 28971.35,21517.58 28971.35,21617.57 28703.29,21885.62 28703.29,22234.81 28878.8,22410.31 RN2.4@28916.55,22410.31
O_IN_3: H4.3 R13.2 RN2.5 U7.7 | length 1936.9
  Top Layer w15: 28526.78,21463.17 28609.51,21380.45 H4.3 ; RN2.5 29212.35,22509.52 U7.7
  Top Layer w20: R13.2 28526.78,21463.17 28556.5,21492.89 28556.5,22257.89 28808.91,22510.31 RN2.5@28916.55,22510.31
O_IN_4: H5.3 R16.2 RN2.6 U7.6 | length 1985.8
  Top Layer w15: H5.3 27969.29,21842.37 28028.19,21901.27 R16.2 ; RN2.6 29001.39,22609.52 29057.15,22553.76 U7.6
  Top Layer w20: R16.2 28136.58,21782.28 28234.25,21782.28 28372.69,21920.72 28372.69,22233.61 28749.39,22610.31 RN2.6@28916.55,22610.31
O_IN_5: H6.3 R17.2 RN2.7 U7.5 | length 1626.7
  Top Layer w15: H6.3 28133.52,22250.51 ; RN2.7 28979.25,22709.52 29085.02,22603.76 U7.5
  Top Layer w20: R17.2 28136.58,22247.44 28164.08,22219.94 28253.91,22219.94 28744.28,22710.31 RN2.7@28916.55,22710.31
O_IN_6: HD10.1 R20.2 RN2.8 U7.4 | length 1489.1
  Top Layer w15: RN2.8@28916.55,22810.31 28954.35,22810.31 29110.9,22653.76 U7.4
  Top Layer w20: HD10.1@28028.2,22861.72 28173.36,22716.55 R20.2 28304.32,22652.92 28359.06,22598.18 28448.56,22598.18 28660.69,22810.31 RN2.8@28916.55,22810.31
O_IN_7: HD11.1 R21.2 RN2.9 U7.3 | length 1465.7
  Top Layer w15: RN2.9@28916.55,22910.31 28938.19,22910.31 29144.74,22703.76 U7.3
  Top Layer w20: HD11.1 28146.06,23141.06 R21.2 28318.5,23071.31 28410.2,22979.61 28795.89,22979.61 28865.19,22910.31 RN2.9@28916.55,22910.31
P02: RN1.3 U1.15 U6.20 | length 2062.9
  Top Layer w15: U6.20 29073.99,23745.93 29119.74,23700.18 RN1.3 29216.76,23437.39 29910.22,23437.39 30072.9,23274.72 U1.15
P04: RN1.5 U1.16 U6.18 | length 2307.9
  Top Layer w15: U6.18 28973.99,23743.97 28919.74,23689.72 RN1.5 29137.03,23317.11 29904.85,23317.11 30047.25,23174.72 U1.16
P06: RN1.7 U1.17 U6.16 | length 2590.7
  Top Layer w15: U6.16 28873.99,23852.62 28719.74,23698.36 RN1.7 29031.43,23222.72 29850.6,23222.72 29998.6,23074.72 U1.17
P08: RN1.9 U1.18 U6.14 | length 2872.1
  Top Layer w15: U6.14 28773.99,23943.56 28519.74,23689.31 RN1.9 28925.13,23129.01 ; 28926.58,23129.01 29791.77,23129.01 29946.07,22974.72 U1.18
P19: U1.25
P35: U1.67
P36: U1.66
P38: U1.68
P40: U1.65
P41: U1.69
P42: U1.64
P47: U1.70
P48: U1.63
PA0: U1.38
PA1: U1.8
PA3: U1.9
PA4: U1.36
PA5: U1.10
PA6: U1.35
PA7: U1.11
PA8: U1.83
PA9: U1.49
PA10: U1.84
PA11: U1.48
PA12: U1.85
PA15: U1.47
PB0: U1.33
PB1: U1.13
PB2: U1.32
PB3: U1.2
PB4: U1.43
PB5: U1.3
PB6: U1.42
PB10: H7.1 U1.55 | length 547.1
  Top Layer w10: U1.55 31582.56,23627 31729.03,23627
  Top Layer w20: 31729.03,23627 31748.71,23646.68 32046.34,23646.68 H7.1
PB11: H7.2 U1.78 | length 444.5
  Top Layer w20: U1.78 31688.32,23674.72 31754.85,23741.24 H7.2
PB12: U1.54
PB13: U1.79
PB14: U1.53
PB15: U1.80
PC3: U1.39
PC4: U1.34
PC6: U1.81
PC7: U1.51
PC8: U1.82
PC9: U1.50
PC10: U1.86
PC11: U1.46
PC12: U1.87
PD0: U1.56
PD1: U1.77
PD2: U1.57
PD3: U1.76
PE0: U1.5
PE1: U1.40
pads on no net: Dr1.1 Dr2.1 Dr3.1 Dr4.1 U1.12 U1.52 U2.5 U2.6 U2.8 U2.9 U3.5 U3.6 U3.8 U3.9

## Polygon pours and split planes (outlines as drawn)
GND on Bottom Layer "Top Layer-No Net" (solid, remove dead copper, pour order 6): 27770.9,25570.9 32232.08,25570.9 32287.25,25497.26 32287.25,21004.11 27832.77,21004.11 27770.9,21065.98
GND on Top Layer "Top Layer-No Net" (solid, remove dead copper, pour order 4): 27815.01,25552.48 32231.41,25552.48 32288.93,25494.96 32250.58,25456.61 32250.58,21040.21 27802.23,21040.21 27783.05,21059.39

## Silkscreen, mask and mechanical layers (free items; w line width, h text height)
Top Overlay:
  text "470" at 30663.12,25435.41 h30 r90
  text "104" at 30341.79,25372.42 h60 r90
  text "10u" at 30296.49,25117.08 h60 r90
  text "PUL" at 28537.47,25051.21 h60
  text "DIR" at 28770.4,25051.21 h60
  text "PUL" at 29322.36,25051.21 h60
  text "DIR" at 29564.13,25051.21 h60
  text "5V" at 31369.93,25049.01 h60
  text "104" at 31701.16,24903.58 h60
  text "4.7k" at 29836.5,24894.28 h60 r270
  text "104" at 29428.96,24874.81 h60 r270
  text "DIR" at 28221.28,24630.93 h60
  text "74LCV4245" at 28729.17,24585.89 h50
  text "PUL" at 28221.28,24434.74 h60
  text "104" at 29455.08,24007.12 h60
  text "10k" at 29722.98,23999.73 h60
  text "DIR" at 28221.28,23837.19 h60
  text "PUL" at 28221.28,23629.66 h60
  text "IN8" at 28245.58,23302.79 h60
  text "1k" at 28585.55,23119.85 h60
  text "IN7" at 28248.59,22890.4 h60
  text "74LCV4245" at 29478.3,22324.79 h50 r90
  text "IN6" at 28105.39,22177.79 h60
  text "IN5" at 28100.28,21758.41 h60
  text "4.7k" at 31968.2,21672.26 h60
  text "B" at 30244.24,21499.32 h60
  text "A" at 30443.52,21499.32 h60
  text "B" at 30663.54,21499.32 h60
  text "A" at 30858.29,21499.32 h60
  text "B" at 31054.58,21499.32 h60
  text "A" at 31288.89,21499.32 h60
  text "B" at 31473.87,21499.32 h60
  text "A" at 31675.41,21499.32 h60
  text "IN3" at 28937.61,21375.19 h60
  text "IN2" at 29341.65,21371.78 h60
  text "IN1" at 29728.64,21371.78 h60
  text "IN4" at 28528.46,21370.08 h60
Bottom Overlay:
  text "102" at 30710.83,23723.06 h60
  text "102" at 31839.27,22234.48 h60